# Altium PCB PCB1.pcbdoc
Units mm, origin at the board's own origin, x right, y up, seen from the top; angles counter-clockwise.
Board outline 100.56 x 66.7 mm, 2 copper layers (Top Layer, Bottom Layer); 21 components, 2 nets, 52 pads, 0 vias.
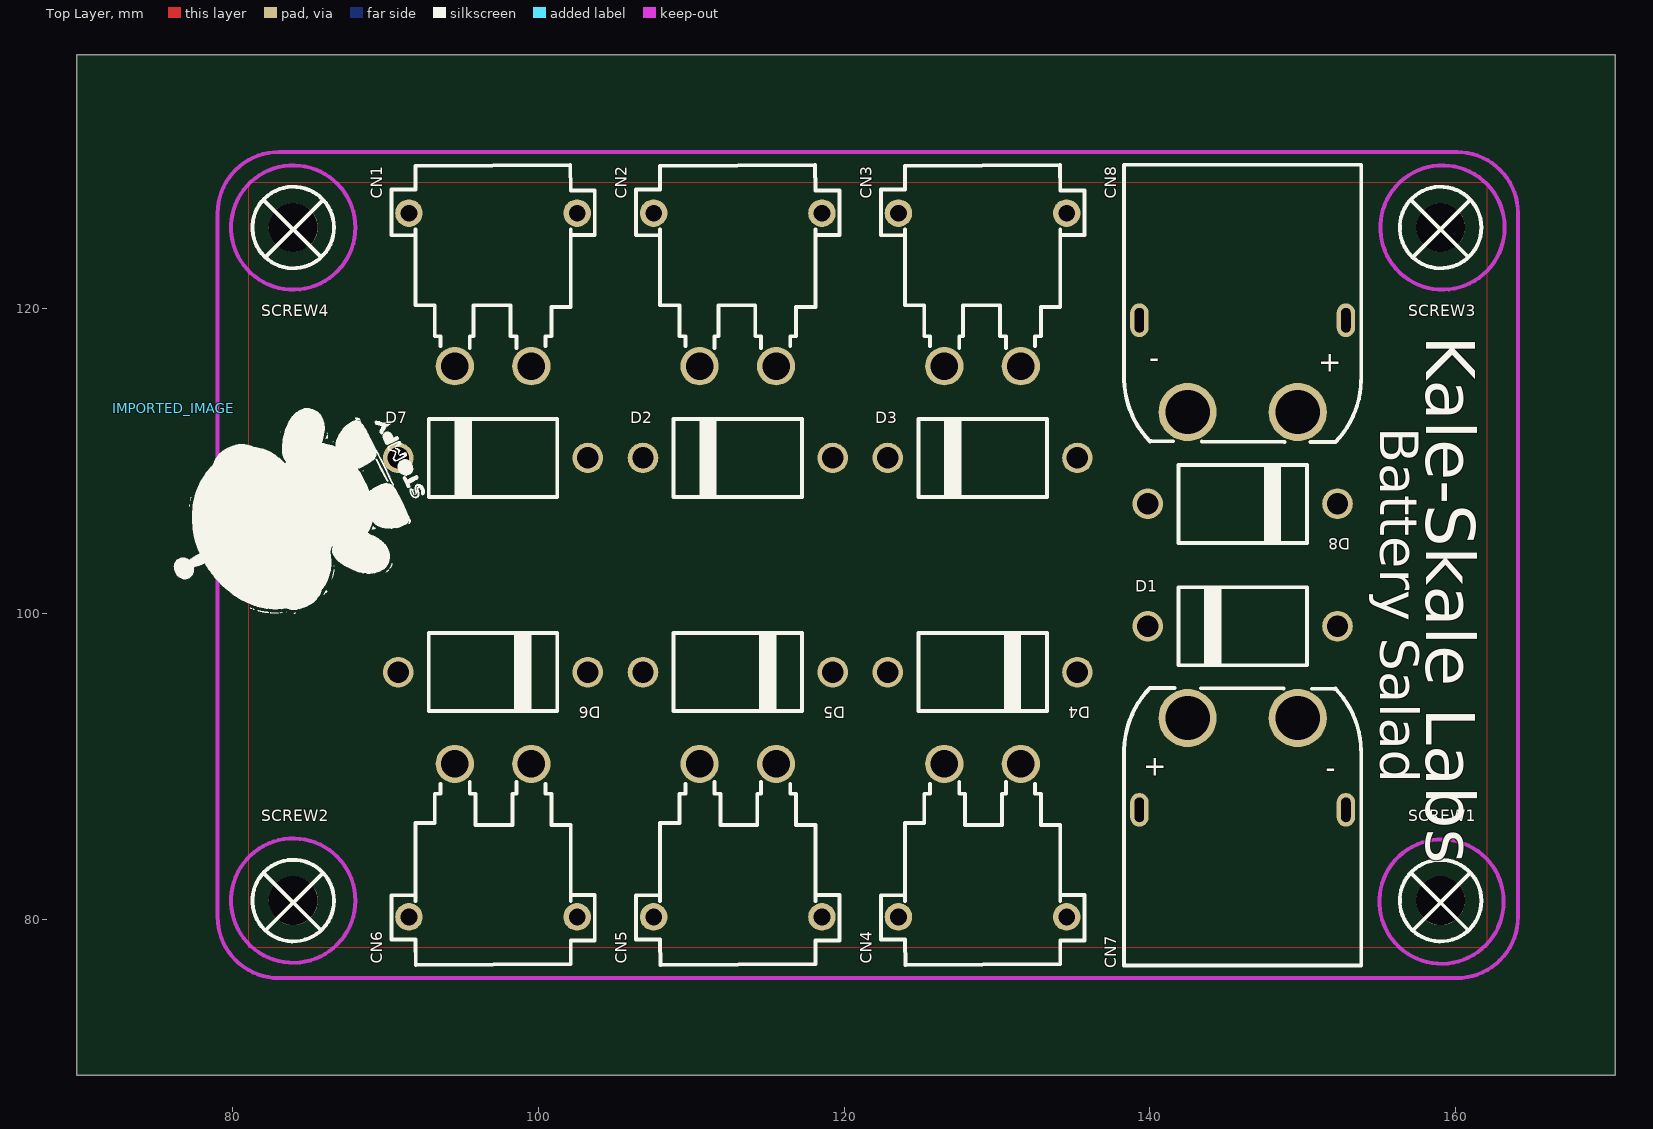
[diagram p0: Top Layer view]
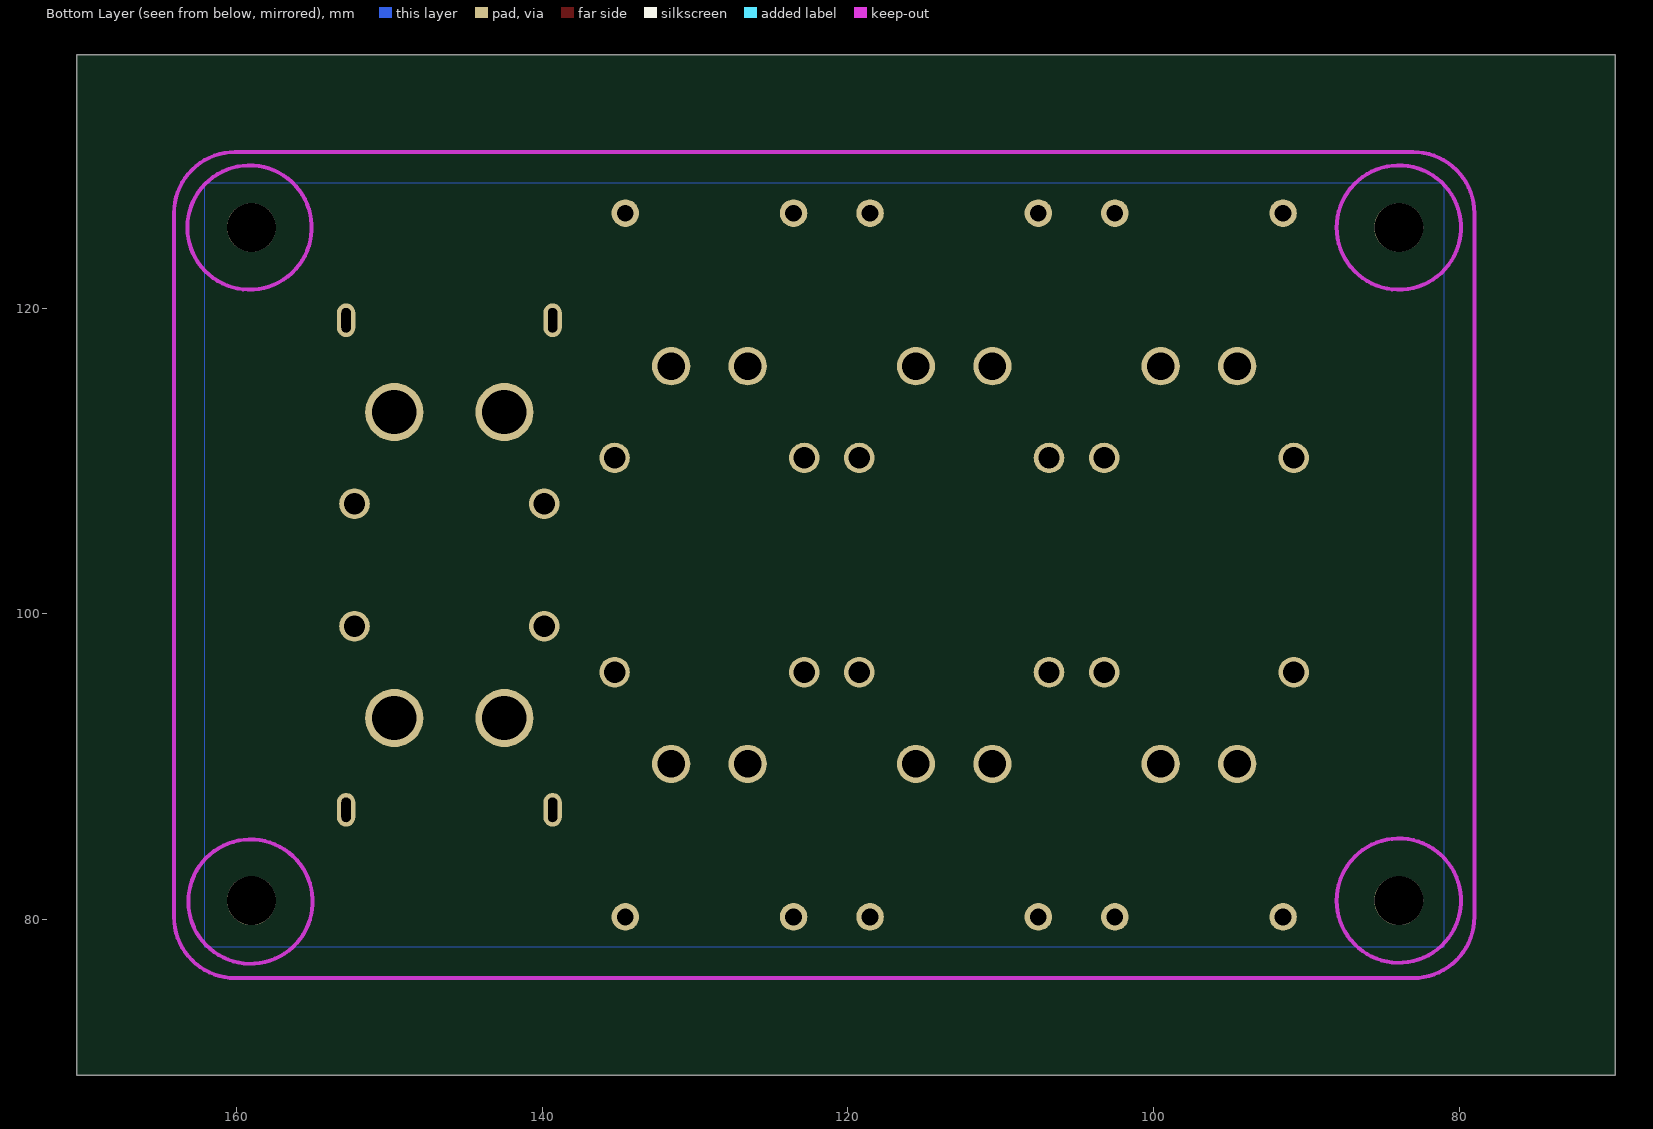
[diagram p1: Bottom Layer view, seen from below]

## Layer stack, top to bottom
Top Layer: signal copper (thickness not stored)
Dielectric: dielectric 0.32, FR-4, Dk 4.8
Bottom Layer: signal copper (thickness not stored)

## Board outline
170.407,69.85 69.85,69.85 69.85,136.55 170.407,136.55

## Components (designator, comment, footprint, x,y, rotation, side; value= is the part's Value field where it differs from the comment)
CN1 "XT30PW-M30.G.Y" CONN-TH_XT30PW-M 97.057,121.2 r180 top
CN2 "XT30PW-M30.G.Y" CONN-TH_XT30PW-M 113.057,121.2 r180 top
CN3 "XT30PW-M30.G.Y" CONN-TH_XT30PW-M 129.057,121.2 r180 top
CN4 "XT30PW-M30.G.Y" CONN-TH_XT30PW-M 129.057,85.2 r0 top
CN5 "XT30PW-M30.G.Y" CONN-TH_XT30PW-M 113.057,85.2 r0 top
CN6 "XT30PW-M30.G.Y" CONN-TH_XT30PW-M 97.057,85.2 r0 top
CN7 "XT60PW-M" CONN-TH_XT60PW-M 146.057,90.2 r90 top
CN8 "XT60PW-M" CONN-TH_XT60PW-M 146.057,116.2 r270 top
D1 "1.5KE82AHE3_A/D" DIO-TH_BD5.1-L8.4-P12.40-D1.0-RD 146.057,99.2 r0 top
D2 "1.5KE82AHE3_A/D" DIO-TH_BD5.1-L8.4-P12.40-D1.0-RD 113.057,110.2 r0 top
D3 "1.5KE82AHE3_A/D" DIO-TH_BD5.1-L8.4-P12.40-D1.0-RD 129.057,110.2 r0 top
D4 "1.5KE82AHE3_A/D" DIO-TH_BD5.1-L8.4-P12.40-D1.0-RD 129.057,96.2 r180 top
D5 "1.5KE82AHE3_A/D" DIO-TH_BD5.1-L8.4-P12.40-D1.0-RD 113.057,96.2 r180 top
D6 "1.5KE82AHE3_A/D" DIO-TH_BD5.1-L8.4-P12.40-D1.0-RD 97.057,96.2 r180 top
D7 "1.5KE82AHE3_A/D" DIO-TH_BD5.1-L8.4-P12.40-D1.0-RD 97.057,110.2 r0 top
D8 "1.5KE82AHE3_A/D" DIO-TH_BD5.1-L8.4-P12.40-D1.0-RD 146.057,107.2 r180 top
IMPORTED_IMAGE "IMPORTED_IMAGE" IMPORTED_IMAGE 76.2,113.456 r0 top
SCREW1 "Screw-Hole-M3" Screw-Hole-M3 159.057,81.2 r0 top
SCREW2 "Screw-Hole-M3" Screw-Hole-M3 84.057,81.2 r0 top
SCREW3 "Screw-Hole-M3" Screw-Hole-M3 159.057,125.2 r0 top
SCREW4 "Screw-Hole-M3" Screw-Hole-M3 84.057,125.2 r0 top

## Footprints (in the part's own frame and the unit in brackets; to place one, negate y for a bottom-side part, rotate by r counter-clockwise, add the part's x,y. Pads: shape width x height; smd on the part's side, far side on the other; paste and mask are expansions set on the pad)
CONN-TH_XT30PW-M [mm]
  round 2.5 hole 1.8: 1(-2.5,5) 2(2.5,5)
  round 1.8 hole 1.1: 3(5.5,-5) 4(-5.5,-5)
  silkscreen extent -6.65,-8.15 6.65,3.81
CONN-TH_XT60PW-M [mm]
  round 3.8 hole 2.9: 1(3,-3.6) 2(3,3.6)
  oval 2.2x1.2 hole 0.6 slot 1.6 at 0 deg: 3(-3,6.75) 4(-3,-6.75)
  silkscreen extent -13.17,-7.75 4.96,7.75
DIO-TH_BD5.1-L8.4-P12.40-D1.0-RD [mm]
  round 2 hole 1.4: 1(-6.2,0) 2(6.2,0)
  silkscreen extent -4.2,-2.6 4.2,2.6
IMPORTED_IMAGE [mm]
  silkscreen extent 0,-13.43 16.4,0
Screw-Hole-M3 [mil]
  round 126 hole 126: 1(-2.5,2.5)
  silkscreen extent -107,-102 102,107

## Nets (pads, with @x,y where several pads share a name; then routed paths per layer and width w, separated by ;. In a path a pad name is that pad's centre, name@x,y a point inside that pad or via, vN(x,y) a via of type N, cw(c..) or ccw(c..) an arc to the next point about the centre after c; other vN are vias at no path point)
GND: CN1.1 CN2.1 CN3.1 CN4.1 CN5.1 CN6.1 CN7.1 CN8.1 D1.2 D2.2 D3.2 D4.2 D5.2 D6.2 D7.2 D8.2
VCC: CN1.2 CN2.2 CN3.2 CN4.2 CN5.2 CN6.2 CN7.2 CN8.2 D1.1 D2.1 D3.1 D4.1 D5.1 D6.1 D7.1 D8.1
pads on no net: CN1.3 CN1.4 CN2.3 CN2.4 CN3.3 CN3.4 CN4.3 CN4.4 CN5.3 CN5.4 CN6.3 CN6.4 CN7.3 CN7.4 CN8.3 CN8.4 SCREW1.1 SCREW2.1 SCREW3.1 SCREW4.1

## Polygon pours and split planes (outlines as drawn)
VCC on Top Layer (solid, remove dead copper, pour order 0): 81.057,78.2 162.057,78.2 162.057,128.2 81.057,128.2
GND on Bottom Layer (solid, remove dead copper, pour order 4): 81.057,78.2 162.057,78.2 162.057,128.2 81.057,128.2

## Keep-outs
Board Outline Layer:
  lines w0.254: 79.057,80.2 ccw(c83.057,80.2) 83.057,76.2 160.057,76.2 ccw(c160.057,80.2) 164.057,80.2 164.057,126.2 ccw(c160.057,126.2) 160.057,130.2 83.057,130.2 ccw(c83.057,126.2) 79.057,126.2 79.057,80.2
Multi-Layer:
  circle w0.254: c83.993,125.264 r4.064
  circle w0.254: c159.12,125.264 r4.064
  circle w0.254: c83.993,81.264 r4.064
  circle w0.254: c159.057,81.2 r4.064

## Silkscreen, mask and mechanical layers (free items; w line width, h text height)
Top Silkscreen Layer:
  text "Kale-Skale Labs" at 158.057,118.2 h3.2 r270
  text "Battery Salad" at 155.057,112.2 h2.5 r270

## Text inside footprints (layer, text, board x,y; h text height)
CN7: Top Silkscreen Layer "-" at 152.153,90.31 h1.33 r180; Top Silkscreen Layer "+" at 141.104,90.564 h1.33 r180
CN8: Top Silkscreen Layer "-" at 139.961,116.09 h1.33; Top Silkscreen Layer "+" at 151.01,115.836 h1.33